# Altium PCB pulsePreamplifier.PcbDoc
Units mm, origin at the board's own origin, x right, y up, seen from the top; angles counter-clockwise.
Board outline 28.8 x 28.2 mm, 2 copper layers (Top Layer, Bottom Layer); 18 components, 12 nets, 50 pads, 3 vias.
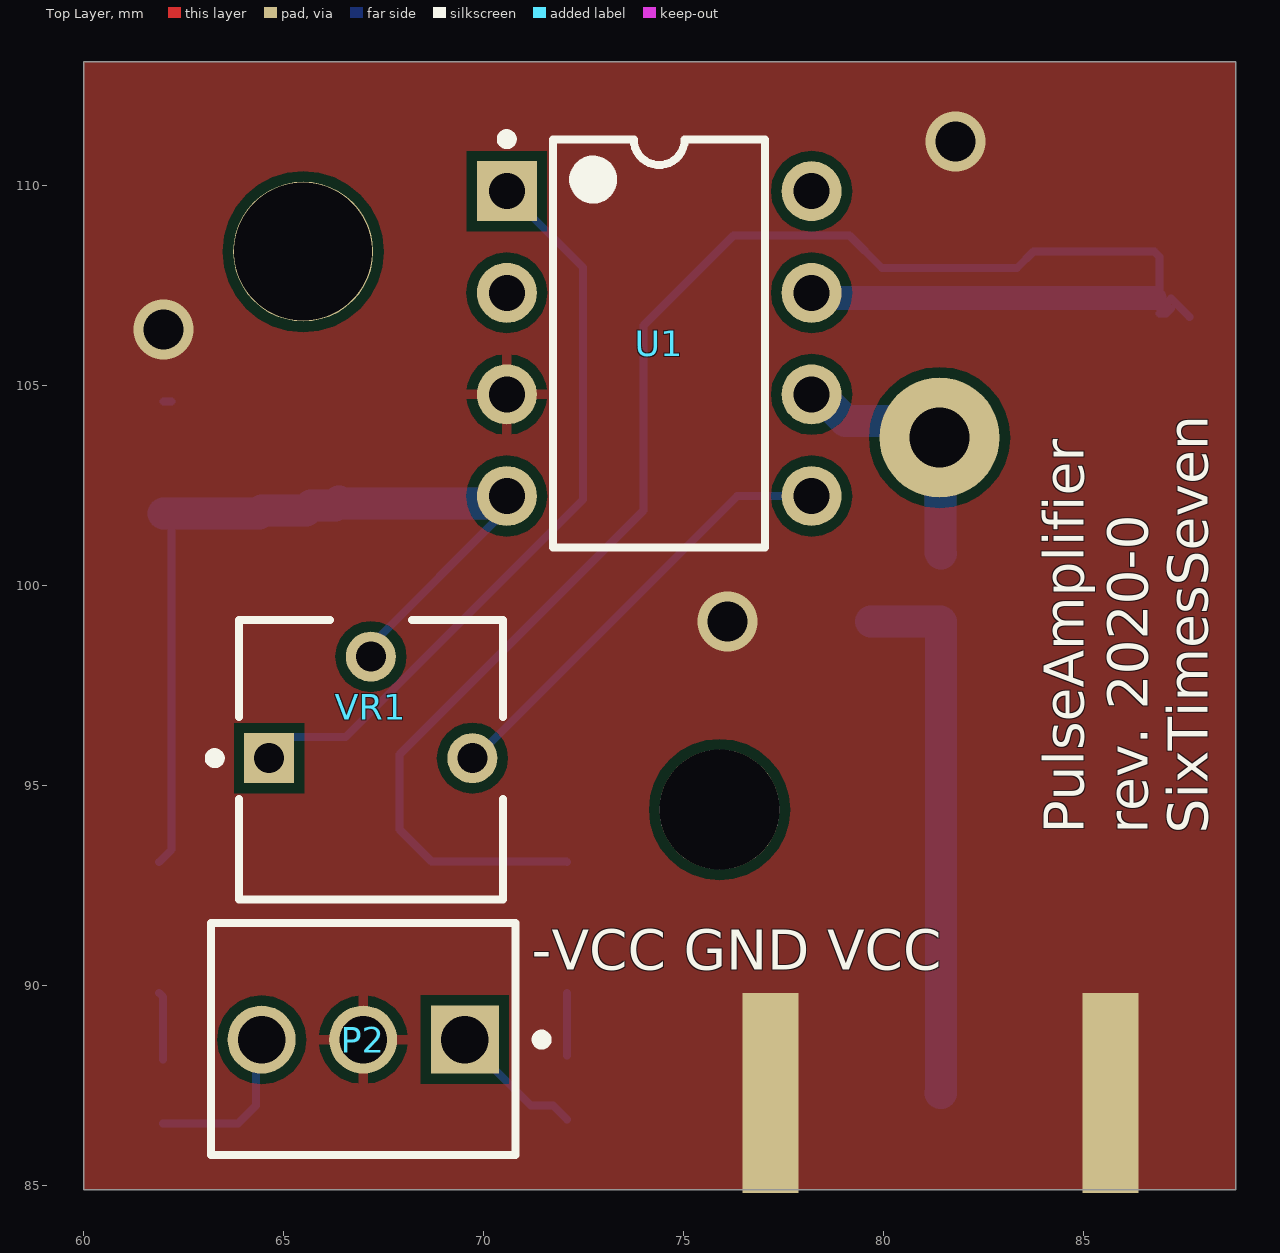
[diagram p0: Top Layer view]
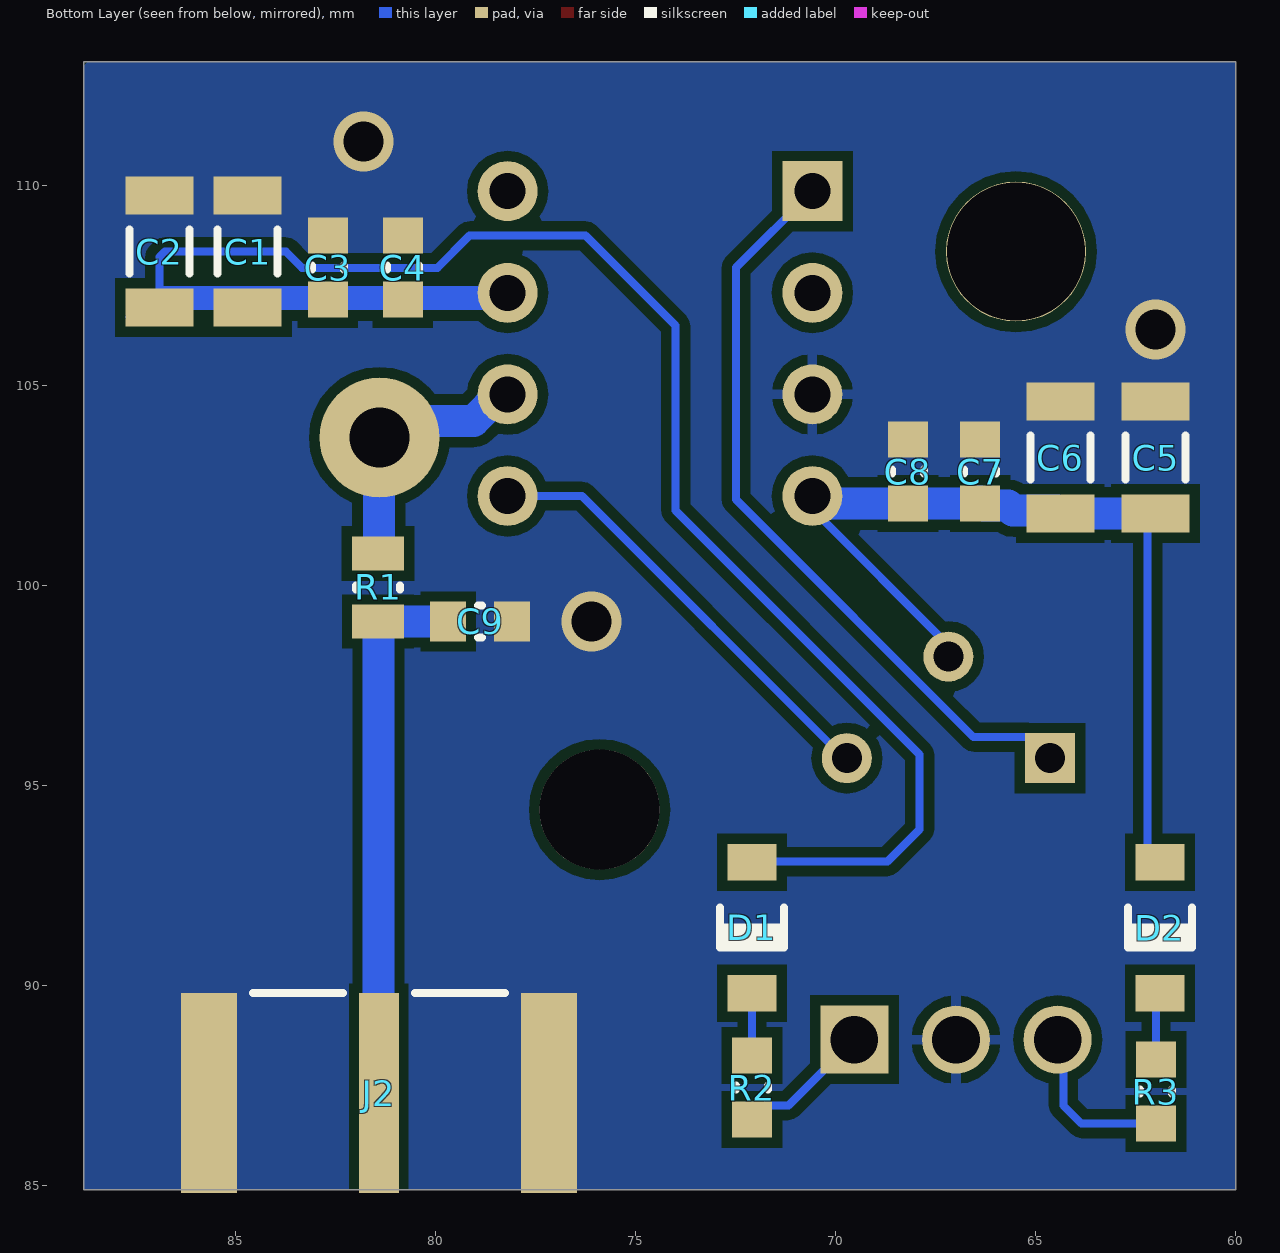
[diagram p1: Bottom Layer view, seen from below]

## Layer stack, top to bottom
Top Solder: solder mask 0.0102, Solder Resist, Dk 3.5
Top Layer: signal copper 0.0356
Dielectric 1: dielectric 0.32, FR-4, Dk 4.8
Bottom Layer: signal copper 0.0356
Bottom Solder: solder mask 0.0102, Solder Resist, Dk 3.5

## Board outline
60,113.1 88.8,113.1 88.8,84.9 60,84.9

## Design rules (kind name [scope] priority, off if disabled: settings)
Clearance [All] p1: gap=0.254 ignorepadtopadclearanceinfootprint=FALSE except(0: Arc-Hole Track-Hole SMDPad-Hole THPad-Hole Via-Hole Fill-Hole Poly-Hole Region-Hole Text-Hole)
PolygonConnect [All] p1: thpad.connectstyle=Relief thpad.reliefconductorwidth=0.254 thpad.reliefentries=4 thpad.polygonreliefangle="90 Angle" thpad.airgapwidth=0.254 smdpad.connectstyle=Direct smdpad.reliefconductorwidth=0.254 smdpad.reliefentries=4 smdpad.polygonreliefangle="90 Angle" smdpad.airgapwidth=0.254 via.connectstyle=Direct via.reliefconductorwidth=0.254 via.reliefentries=4 via.polygonreliefangle="90 Angle" via.airgapwidth=0.254
RoomDefinition pulsePreamplifier [InComponentClass('pulsePreamplifier')] p1: confinementstyle=ConfineIn formatcopy=TRUE lockcomponents=FALSE outline 178.943,26.924 435.483,26.924 435.483,44.577 178.943,44.577
RoutingVias [All] p1: holewidth=0.3 width=0.6 viastyle="Through Hole" minholewidth=0.3 minwidth=0.6 maxholewidth=6 maxwidth=2
SolderMaskExpansion [All] p1: expansion=0.102 istentingtop=FALSE
Width [All] p1: maxlimit=5 minlimit=0.152 preferedwidth=0.2
30 further rules are at their usual default settings.

## Components (designator, comment, footprint, x,y, rotation, side; value= is the part's Value field where it differs from the comment)
C1 "10uF" CAPC1206(3216)130_L 84.699,108.35 r270 bottom
C2 "10uF" CAPC1206(3216)130_L 86.903,108.35 r270 bottom
C3 "100nF" CAPC0603(1608)100_N 82.694,107.95 r270 bottom
C4 "1uF" CAPC0603(1608)100_N 80.819,107.95 r270 bottom value=100nF
C5 "10uF" CAPC1206(3216)130_L 62,103.2 r270 bottom
C6 "10uF" CAPC1206(3216)130_L 64.382,103.2 r270 bottom
C7 "100nF" CAPC0603(1608)100_N 66.386,102.85 r270 bottom
C8 "1uF" CAPC0603(1608)100_N 68.19,102.85 r270 bottom value=100nF
C9 "tbd" CAPC0603(1608)100_N 78.884,99.105 r180 bottom value=100nF
D1 "MMSD4148T3G" ONSC-SOD123-2-425G-04_V 72.09,91.45 r90 bottom
D2 "MMSD4148T3G" ONSC-SOD123-2-425G-04_V 61.89,91.45 r90 bottom
J2 "32K145-400L5" ROS-32K145-400L5_V 81.419,84.81 r0 bottom
P2 "22-27-2031" MOLX-22-27-2031_V 66.99,88.65 r180 top
R1 "100k" RESC0805(2012)_L 81.439,99.955 r90 bottom value="10200.00 Ohm"
R2 "100k" RESC0603(1608)_N 72.09,87.45 r90 bottom value="100.00 Ohm"
R3 "100k" RESC0603(1608)_N 61.99,87.35 r90 bottom value="100.00 Ohm"
U1 "LT1792ACN8#PBF" LT-N8-8 74.39,106.05 r0 top
VR1 "10k" BOUR-3362P 67.18,95.65 r0 top

## Footprints (in the part's own frame and the unit in brackets; to place one, negate y for a bottom-side part, rotate by r counter-clockwise, add the part's x,y. Pads: shape width x height; smd on the part's side, far side on the other; paste and mask are expansions set on the pad)
BOUR-3362P [mm] "THD, 3-Leads, Body 6.6x6.99mm, Pitch 2.54mm"
  rect 1.25x1.25 hole 0.75: 1(-2.54,0.035)
  round 1.25 hole 0.75: 2(0,2.575) 3(2.54,0.035)
  silkscreen extent -4.02,-3.49 3.3,3.5, body extent -3.3,-3.49 3.3,3.49, height 4.95
CAPC0603(1608)100_N [mm] "Chip Capacitor, Body 1.6x0.8mm, Height 1.0mm, IPC Medium Density"
  rect 0.9x1 smd: 1(-0.8,0) 2(0.8,0)
  silkscreen extent -0.05,-0.4 0.05,0.4, body extent -0.87,-0.48 0.88,0.47, height 1
CAPC1206(3216)130_L [mm] "Chip Capacitor, Body 3.2x1.6mm, Height 1.3mm, IPC High Density"
  rect 0.95x1.7 smd: 1(-1.4,0) 2(1.4,0)
  silkscreen extent -0.55,-0.75 0.55,0.75, body extent -1.7,-0.9 1.7,0.9, height 1.3
LT-N8-8 [mm] "DIP, 8-Leads, Body 10.16x6.48mm, Pitch 2.54mm"
  rect 1.5x1.5 hole 0.9: 1(-3.81,3.81)
  round 1.5 hole 0.9: 2(-3.81,1.27) 3(-3.81,-1.27) 4(-3.81,-3.81) 5(3.81,-3.81) 6(3.81,-1.27) 7(3.81,1.27) 8(3.81,3.81)
  silkscreen extent -3.93,-5.1 2.65,5.23, body extent -3.95,-5.07 3.95,5.07, height 3.94
MOLX-22-27-2031_V [mm] "Header, 3-Leads, Body 7.62x5.8mm, Pitch 2.54mm"
  rect 1.7x1.7 hole 1.19 paste+0: 1(-2.54,0)
  round 1.7 hole 1.19 paste+0: 2(0,0) 3(2.54,0)
  silkscreen extent -4.59,-2.92 3.81,2.88, body extent -3.81,-2.92 3.81,2.88, height 11.71
ONSC-SOD123-2-425G-04_V [mm] "SOD123, 2-Leads, Body 2.69x1.6mm, Height 1.35mm"
  rect 0.915x1.22 smd: 1(-1.637,0) 2(1.637,0)
  silkscreen extent -0.5,-0.8 0.5,0.8, body extent -1.35,-0.8 1.35,0.8, height 1.35
RESC0603(1608)_N [mm] "Chip Resistor, Body 1.6x0.8mm, IPC Medium Density"
  rect 0.9x1 smd: 1(-0.8,0) 2(0.8,0)
  silkscreen extent -0.05,-0.4 0.05,0.4, body extent -0.85,-0.47 0.85,0.47, height 0.6
RESC0805(2012)_L [mm] "Chip Resistor, Body 2.0x1.3mm, IPC High Density"
  rect 0.85x1.3 smd: 1(-0.85,0) 2(0.85,0)
  silkscreen extent -0.05,-0.55 0.05,0.55, body extent -1.1,-0.67 1.1,0.68, height 0.7
ROS-32K145-400L5_V [mm] "SMA Right Angle Jack, Edge Mount, 14.25x9.5x4.46mm, Rosenberger Recommended"
  rect 1x5 smd: 1(0,-2.5)
  rect 1.4x5 smd far side paste-2: MP(-4.25,-2.5) MP(4.25,-2.5)
  rect 1.4x5 smd: MP(-4.25,-2.5) MP(4.25,-2.5)
  silkscreen extent -3.15,-5 3.15,-5, body extent -4.75,-4.75 4.75,9.5, height 4.2

## Part data
C1 C2 C5 C6: library part CMP-1037-04970-1, "CAP 10uF 10V -20% to +80% 1206 (3216 Metric) Thickness 1.3mm SMD", Case-EIA=1206, Case-Metric=3216, Rated Voltage="10 V", Tolerance="-20% to +80%", Max Thickness="1.3 mm", Technology=SMT
C3 C7: library part CMP-1035-02589-1, "CAP 100nF 25V ±20% 0603 (1608 Metric) Thickness 1mm SMD", Case-EIA=0603, Case-Metric=1608, Rated Voltage="25 V", Tolerance=Â±20%, Max Thickness="1 mm", Technology=SMT
C4 C8 C9: library part CMP-1035-02589-1, "CAP 1uF 25V ±20% 0603 (1608 Metric) Thickness 1mm SMD", Case-EIA=0603, Case-Metric=1608, Rated Voltage="25 V", Tolerance=Â±20%, Max Thickness="1 mm", Technology=SMT
D1 D2: library part CMP-0895-00002-1, "Switching Diode, 100 V, 200 mA, -55 to 150 degC, 2-Pin SOD123 (425), RoHS, Tape and Reel", Manufacturer="ON Semiconductor", Temperature Range="-55 to 150 degC", CD (Max)="4 pF", ComponentLink1Description="Manufacturer URL", ComponentLink1URL=http://www.onsemi.com/, ComponentLink2Description=Datasheet, ComponentLink2URL=http://www.onsemi.com/pub_link/Collateral/MMSD4148T1-D.PDF, ComponentLink3Description="Package Specification", ComponentLink3URL=http://www.onsemi.com/pub_link/Collateral/425-04.PDF, DatasheetVersion="Rev. 11", IR @ VR="75 V (Max)=50 uA", Mounting Technology="Surface Mount", PackageDescription="2-Pin SOD123, Body 2.69 x 1.6 mm, Height 1.35 mm", PackageReference=SOD123-2-425G-04, PackageVersion="Rev. 04G", Packing="Tape and Reel", PartNumber=MMSD4148T3G, PD (Max)="425 mW", RoHS=TRUE, Trr (Max)="4 ns", VBR (Min)="100 V", VF (Max)="1 A"
J2: library part CMP-0751-00004-2, "SMA Right Angle Jack, Edge Mount, Up to 18 GHz, -55 to 155 degC", Manufacturer=Rosenberger, ComponentLink1Description="Manufacturer URL", ComponentLink1URL=http://www.rosenberger.de, ComponentLink2Description=Datasheet, ComponentLink2URL=http://rosenberger.de/ok/images/documents/db/32K145-400L5.pdf, ComponentLink3Description="Package Specification", ComponentLink3URL=http://rosenberger.de/ok/images/documents/db/32K145-400L5.pdf, ComponentLink4Description="Series Overview / Design Note", ComponentLink4URL=http://rosenberger.de/ok/images/documents/spez/32.pdf, ComponentLink5Description="Webshop / RFQ", ComponentLink5URL=http://www.rosenberger.com/en/contact/sales/, DatasheetVersion=b00, Desgin Note 2="For more information about DRC setting, please look at following webpage, http://techdocs.altium.com/display/SCRT/Design+Rule+for+Edge-Mount+Connectors", Design Note 1="Footprint in library is a generic example - only application specific footprint delivers High Performance", Mounting Technology="Surface Mount", PackageDescription="SMA Right Angle Jack, Edge Mount, 14.25 x 9.5 x 4.46 mm", PackageReference=32K145-400L5, PackageVersion=b00, PartNumber=32K145-400L5
P2: library part CMP-2000-05538-1, "Male Header, Pitch 2.54 mm, 1 x 3 Position, Height 11.7 mm, Tail Length 3.56 mm, -40 to 80 degC, RoHS, Bulk", Current rating=4A, Manufacturer=Molex, Operating temperature=0°Cto+75°C, Package Description="Male Header, Pitch 2.54 mm, 1 x 3 Position, Height 11.7 mm, Tail Length 3.56 mm", Voltage rating=250V, Contact material=Tinplatedbrass, Datasheet URL=http://www.molex.com/webdocs/datasheets/pdf/en-us/0022272031_PCB_HEADERS.pdf, Datasheet Version=06/2016, Housing material=Nylon(UL94V-0), Manufacturer URL=http://www.molex.com/, Mounting Technology=ThroughHole, Package Reference=22-27-2031, Package URL=http://www.molex.com/pdm_docs/sd/022272031_sd.pdf
R1: library part CMP-1013-00624-1, Case-EIA=0805, Case-Metric=2012, Power="0.125 W", Tolerance="1 %", Technology=SMT
R2 R3: library part CMP-1012-00397-1, "100R 0.1W 1% 0603 (1608 Metric)  SMD", Case-EIA=0603, Case-Metric=1608, Power="0.1 W", Tolerance="1 %", Technology=SMT
U1: library part CMP-0359-01284-2, "Single Channel, Low Distortion, Low Noise, Precision Operational Amplifier, 5.6 MHz Typical GBW, 3.4 V/us Typical SR, 10 to 40 V, 8-Pin DIP (N8-8), Commercial, Pb-Free", Linear Technology Part Number=LT1792, Manufacturer="Linear Technology", Channels (#)=1, ComponentLink1Description="Manufacturer URL", ComponentLink1URL=http://www.linear.com/, ComponentLink2Description=Datasheet, ComponentLink2URL=http://cds.linear.com/docs/en/datasheet/1792f.pdf, ComponentLink3Description="Package Specification", ComponentLink3URL=http://cds.linear.com/docs/en/packaging/05081510_I_N8.pdf, GBW (MHz) Typical=5.6, Is (mA) Typical=4.2, Mounting Technology="Surface Mount", PackageDescription="8-Lead PDIP, Body 10.16 x 6.48 mm, Pitch 2.54 mm", PackageReference=LT-N8-8, PackageVersion="Rev I", PartNumber=LT1792ACN8#PBF, RevisionNote="URLs updated", RoHS=Pb-Free, SR (V/us) Typical=3.4, Type=JFET, Vos (mV) Guaranteed=0.6, Vos (mV) Typical=0.2, Vs Max (V)=40, Vs Min (V)=10
VR1: library part CMP-1747-00004-1, "Square Trimpot(R) Trimming Potentiometer, 10 KOhm, 300 V, -55 to 125 degC, 3-Pin THD, RoHS, Tube", Case Code (Imperial)=0612, Case Code (Metric)=1632, Case/Package=1206, Max Operating Temperature=125degC, Min Operating Temperature=-25degC, Package Quantity=5000, Power Rating="1 W", Resistance="50 mohm", Tolerance=1%, Voltage rating="220 mV", ComponentLink1Description="Manufacturer URL", ComponentLink1URL=http://www.bourns.com/, ComponentLink2Description=Datasheet, ComponentLink2URL=http://www.bourns.com/docs/Product-Datasheets/3362.pdf, DatasheetVersion=May-16, Height="0.6 mm", Length="3.2 mm", Mount="Surface Mount", PackageDescription="3-Pin Through Hole Device, Body 6.6 x 6.99 mm, Pitch 2.54 mm", PackageReference=3326P, Packaging="Tape and Reel", Pins=2, REACH SVHC="No SVHC", RoHSCompliant=True, Width="1.6 mm"

## Free pads (board coordinates)
  round 3.5 hole 3.45: 1(65.49,108.35)
  round 3 hole 1.5: 5(81.4,103.7)
  round 3 hole 3: 6(75.9,94.4)

## Via types
v1: diameter 1.5, hole 1, Top Layer to Bottom Layer, 3 vias

## Nets (pads, with @x,y where several pads share a name; then routed paths per layer and width w, separated by ;. In a path a pad name is that pad's centre, name@x,y a point inside that pad or via, vN(x,y) a via of type N, cw(c..) or ccw(c..) an arc to the next point about the centre after c; other vN are vias at no path point)
+5V: C1.2 C2.2 C3.2 C4.2 D1.2 U1.7 | length 45.5
  Bottom Layer w0.2: D1.2 72.078,93.1 68.7,93.1 67.9,93.9 67.9,95.78 74,101.88 74,106.5 76.25,108.75 79.15,108.75 79.954,107.946 83.341,107.946 83.745,108.35 86.768,108.35 86.903,108.215 C2.2@86.903,107.05 ; C2.2@86.768,107.185 C2.2@86.903,107.05 ; C2.2@86.903,106.8 87.059,106.8 C2.2@87.19,106.931 ; C2.2@87.653,106.718 87.19,107.181 86.959,106.95 C2.2 C2.2@86.903,107.05
  Bottom Layer w0.6: U1.7 78.335,107.185 80.819,107.185 82.694,107.185 84.699,107.185 C2.2@86.768,107.185
-5V: C5.2 C6.2 C7.2 C8.2 D2.2 U1.4 VR1.2 | length 22
  Bottom Layer w0.2: D2.2 62.2,93.397 C5.2@62.2,101.6 ; VR1.2@67.289,98.619 U1.4@70.461,101.79
  Bottom Layer w0.8: C5.2 C6.2 64.457,101.875 65.565,101.875 65.69,102 66.286,102 C7.2@66.386,102.1 ; C7.2 C8.2 70.201,102.05 70.391,102.24 U1.4 ; VR1.2 VR1.2@67.266,98.311
GND: C1.1 C2.1 C3.1 C4.1 C5.1 C6.1 C7.1 C8.1 C9.2 J2.MP P2.2 U1.3 | length 0.2
  Bottom Layer w0.2: C5.1 C5.1@62.2,104.6
  other v1: 76.1,99.1 62,106.4 81.8,111.1
INPUT: U1.2
NetC9_1: C9.1 J2.1 R1.1 | length 13.5
  Bottom Layer w0.8: C9.1 81.419,99.105 81.429,99.096 81.429,87.32 J2.1
NetD1_1: D1.1 R2.2 | length 1.6
  Bottom Layer w0.2: R2.2 D1.1
NetD2_1: D2.1 R3.2 | length 1.7
  Bottom Layer w0.2: D2.1 61.99,89.712 R3.2
NetP2_1: P2.1 R2.1 | length 3.4
  Bottom Layer w0.2: P2.1 71.18,87 71.74,87 R2.1
NetP2_3: P2.3 R3.1 | length 4.2
  Bottom Layer w0.2: R3.1 63.857,86.55 64.307,87 64.307,88.506 P2.3
NetR1_2: pad.5 R1.2 U1.6 | length 6.2
  Bottom Layer w0.8: U1.6@78.066,104.646 U1.6 78.389,104.78 79.048,104.121 pad.5@81.021,104.121 ; pad.5 81.419,103.681 81.419,100.825 R1.2
NetU1_1: U1.1 VR1.1 | length 19
  Bottom Layer w0.2: VR1.1 65.165,96.21 66.55,96.21 72.49,102.15 72.49,107.95 U1.1
NetU1_5: U1.5 VR1.3 | length 11.2
  Bottom Layer w0.2: VR1.3 69.785,95.685 76.34,102.24 U1.5
pads on no net: U1.8

## Polygon pours and split planes (outlines as drawn)
GND on Top Layer "NONET_L-01_P-001" (solid, remove dead copper, pour order 0): 60,113.1 88.8,113.1 88.8,84.9 60,84.9
GND on Bottom Layer "NONET_L-01_P-001" (solid, remove dead copper, pour order 1): 60,113.1 88.7,113.1 88.8,113 88.8,84.9 60,84.9

## Silkscreen, mask and mechanical layers (free items; w line width, h text height)
Top Overlay:
  text "PulseAmplifier" at 85,93.8 h1 r90
  text "rev. 2020-0" at 86.6,93.8 h1 r90
  text "SixTimesSeven" at 88.1,93.8 h1 r90
  text "-VCC GND VCC" at 71.2,90.4 h1
Mechanical 3:
  lines w0.2: 60.8,113.1 60,113.1 ; 60,113.1 60,84.9 88.8,84.9 88.8,113.1 60,113.1
  lines w0.254: 60,52.5 87.5,52.5

## Text inside footprints (layer, text, board x,y; h text height)
J2: Mechanical 3 "Board Edge" at 73.319,84.81 h0.2 r180